# Altium PCB Buton_Unit.PcbDoc
Units mm, origin at the board's own origin, x right, y up, seen from the top; angles counter-clockwise.
Board outline 182.5 x 162.5 mm, 2 copper layers (Top Layer, Bottom Layer); 20 components, 40 nets, 86 pads, 0 vias.
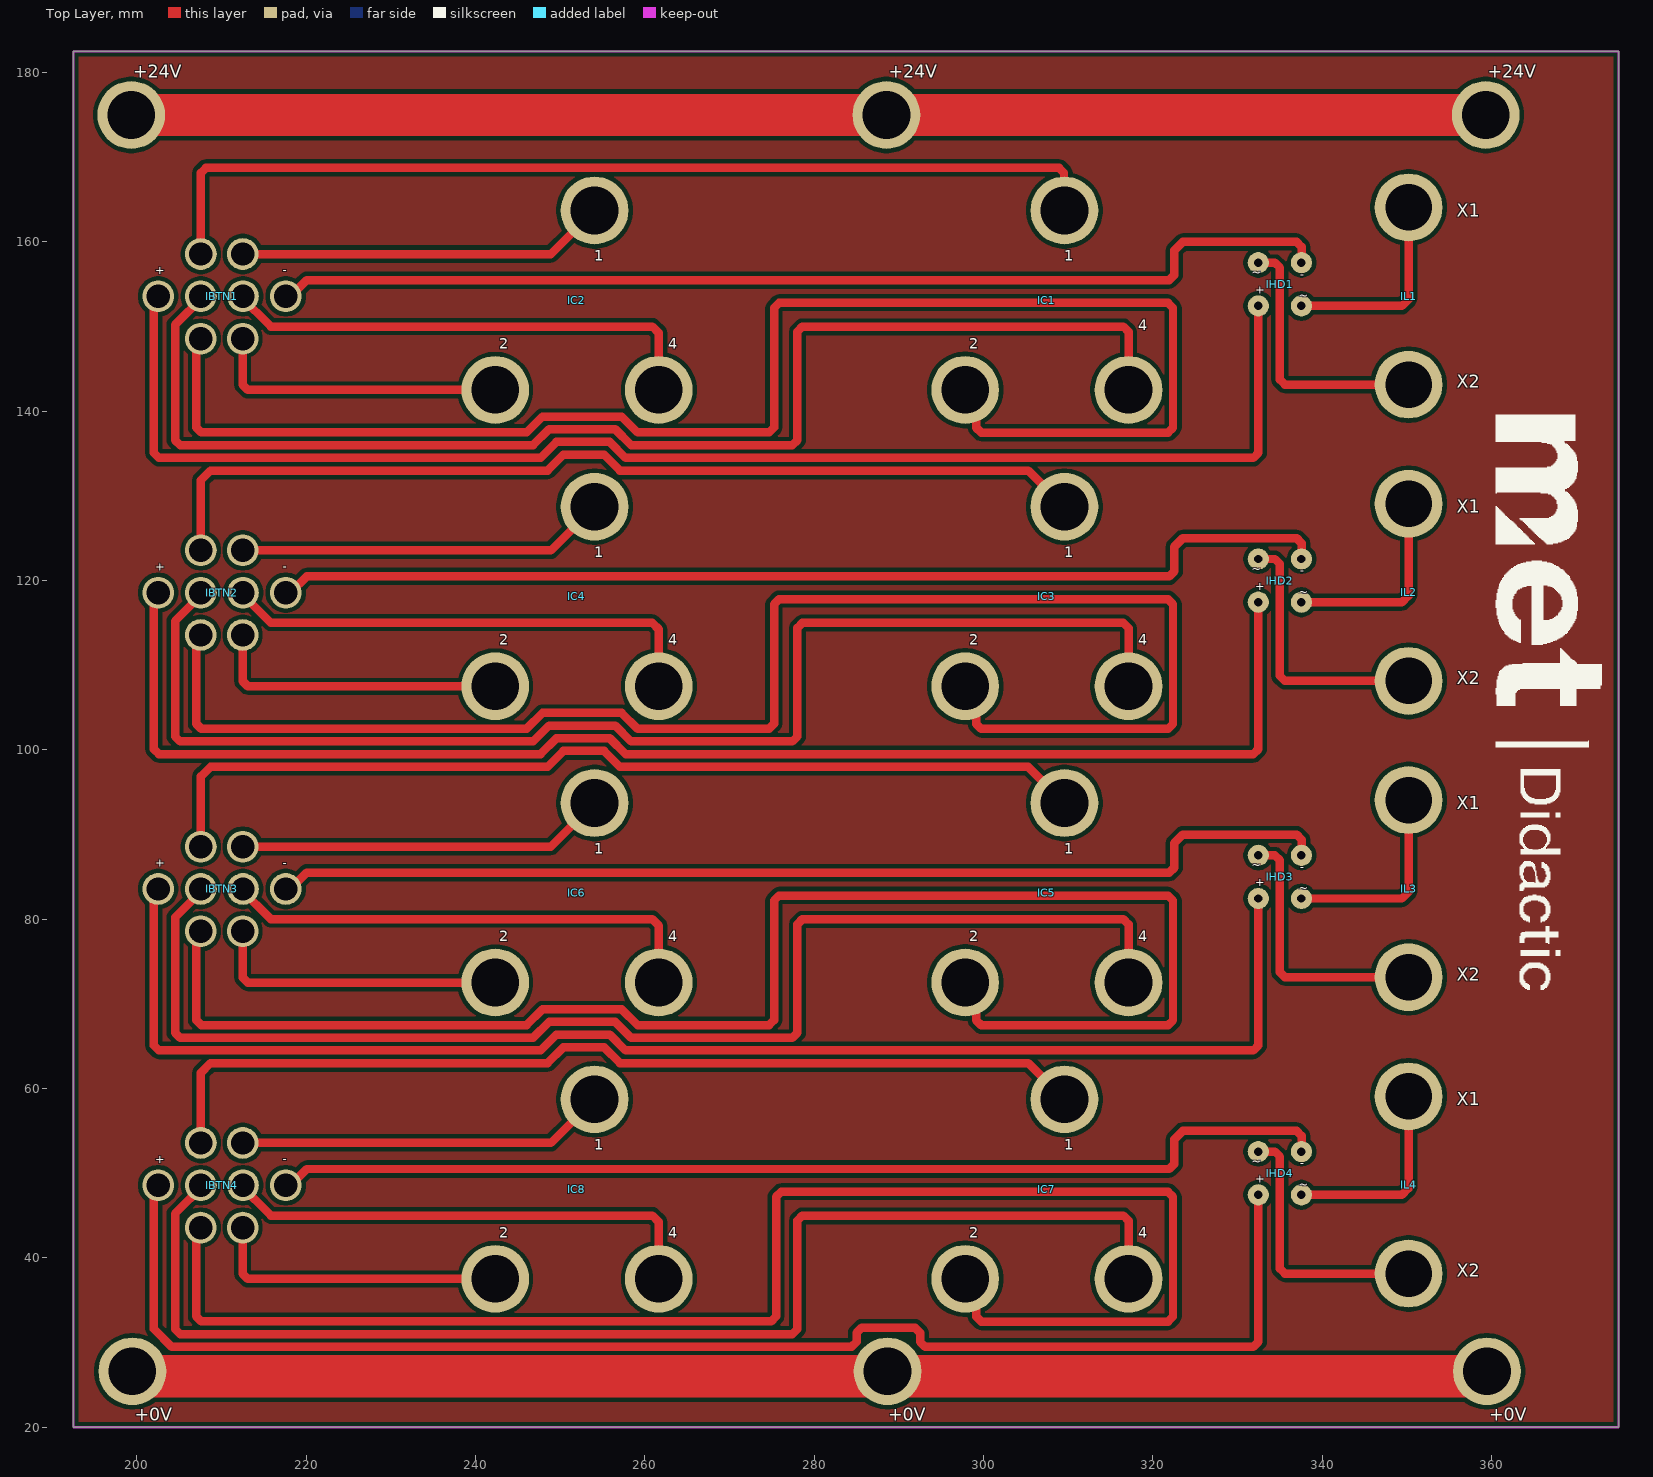
[diagram p0: Top Layer view]
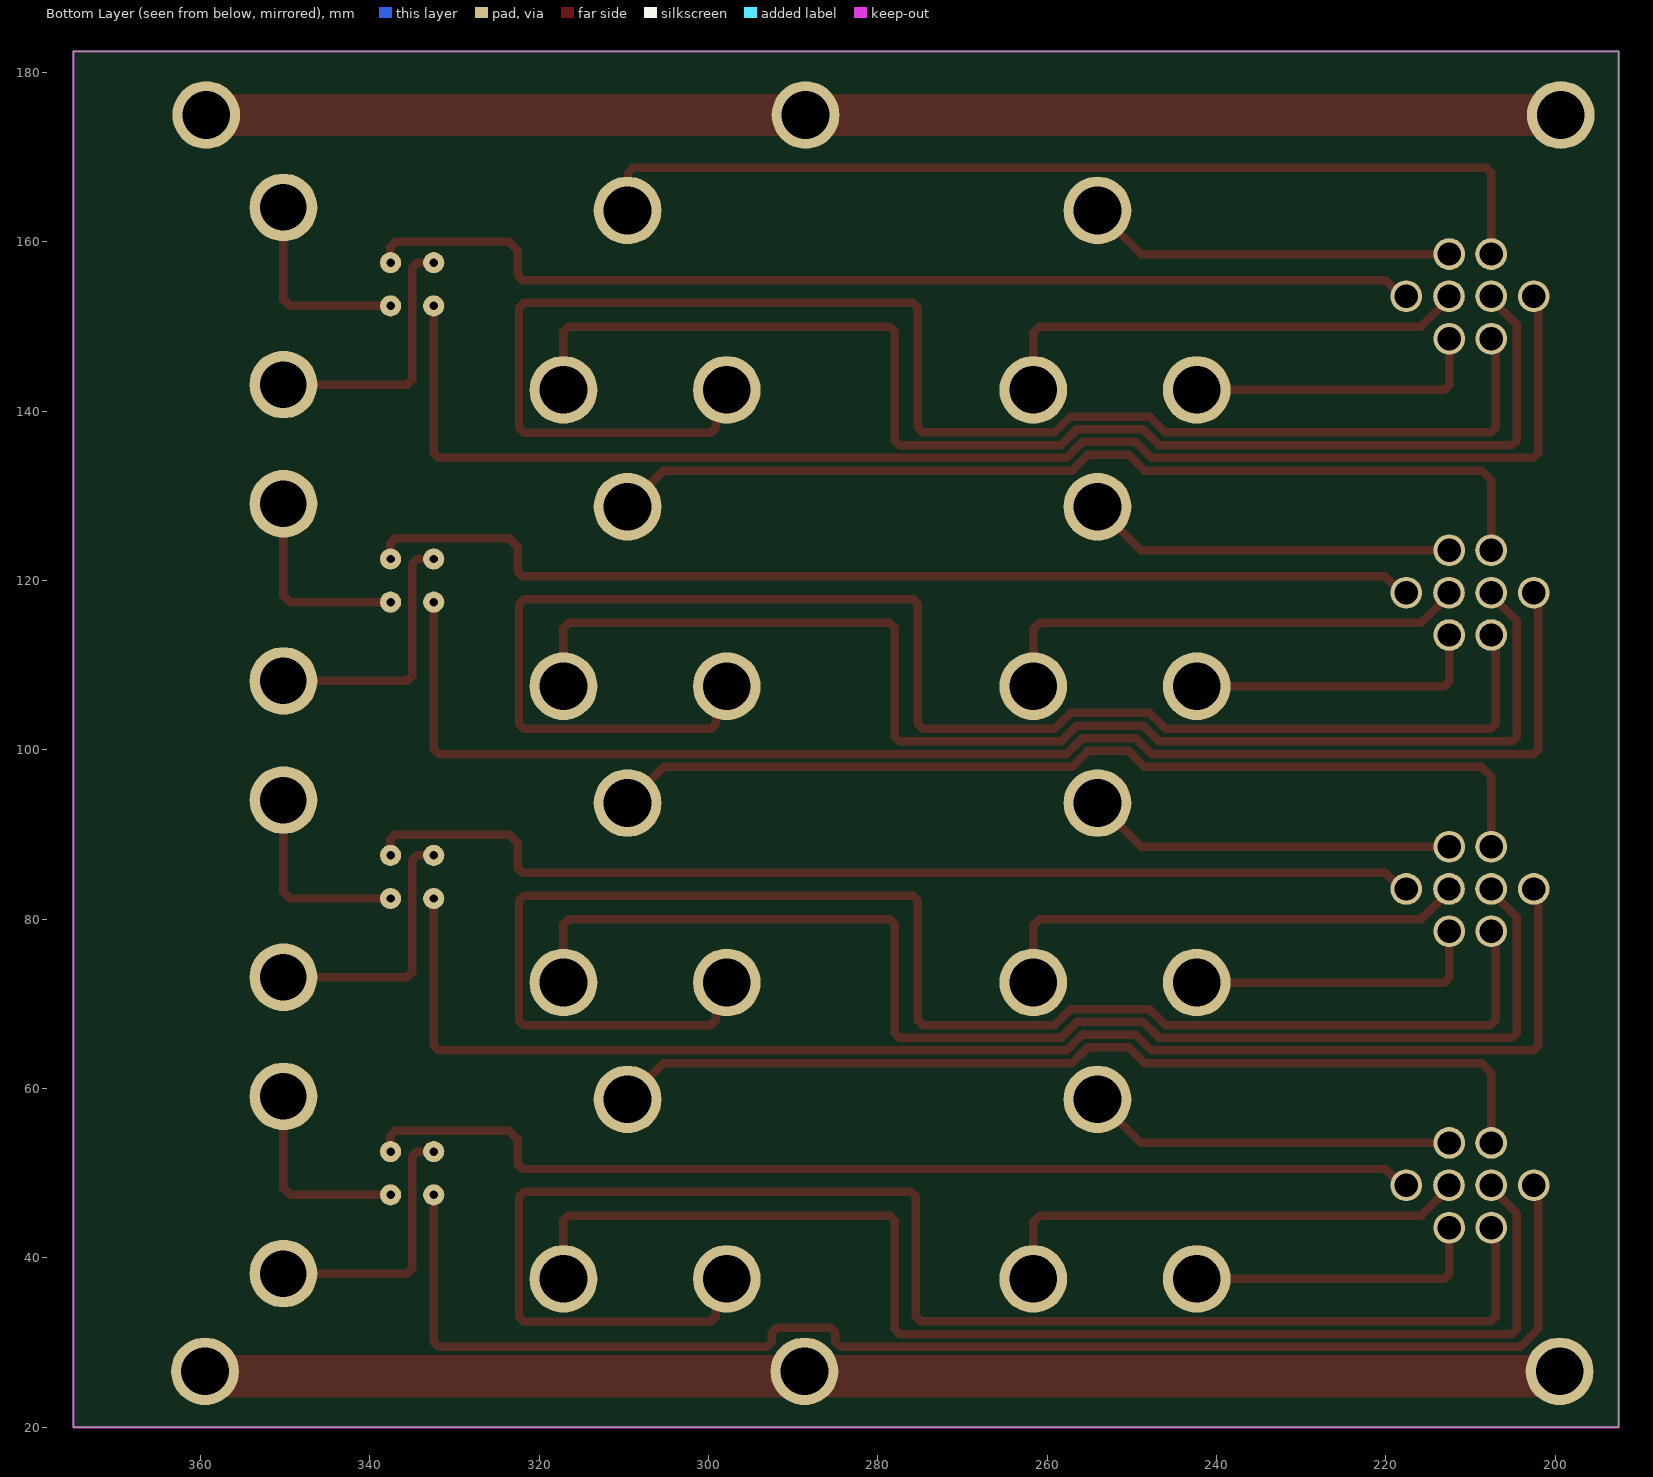
[diagram p1: Bottom Layer view, seen from below]

## Layer stack, top to bottom
Top Solder: solder mask 0.0102, Solder Resist, Dk 3.5
Top Layer: signal copper 0.0356
Dielectric 1: dielectric 0.32, FR-4, Dk 4.8
Bottom Layer: signal copper 0.0356
Bottom Solder: solder mask 0.0102, Solder Resist, Dk 3.5

## Board outline
192.5,20 375,20 375,182.5 192.5,182.5

## Design rules (kind name [scope] priority, off if disabled: settings)
Clearance [All] p1: gap=0.5 ignorepadtopadclearanceinfootprint=FALSE
PolygonConnect [All] p1: connectstyle=Relief reliefconductorwidth=0.254 reliefentries=4 polygonreliefangle="90 Angle" airgapwidth=0.254
RoutingCorners [All] p1: cornerstyle=45-Degree minsetback=2.5 maxsetback=2.5
RoutingLayers [All] p1: top layer_v5=TRUE bottom layer_v5=FALSE
RoutingVias [All] p1: holewidth=0.711 width=1.27 viastyle="Through Hole" minholewidth=0.711 minwidth=1.27 maxholewidth=0.711 maxwidth=1.27
SolderMaskExpansion [All] p1: expansion=0.102 istentingtop=FALSE
Width [All] p1: maxlimit=5 minlimit=1 preferedwidth=1.25 minimp=50.000000 maximp=50.000000 favimp=50.000000
28 further rules are at their usual default settings.

## Components (designator, comment, footprint, x,y, rotation, side; value= is the part's Value field where it differs from the comment)
IBTN1 "8 Pın Buton" 8_Pin_Buton 199.009,143.083 r0 top
IBTN2 "8 Pın Buton" 8_Pin_Buton 199.009,108.083 r0 top
IBTN3 "8 Pın Buton" 8_Pin_Buton 199.009,73.083 r0 top
IBTN4 "8 Pın Buton" 8_Pin_Buton 199.009,38.083 r0 top
IC1 "3 Pin Pano Contact" Contact 293.3,138.025 r0 top
IC2 "3 Pin Pano Contact" Contact 237.8,138.025 r0 top
IC3 "3 Pin Pano Contact" Contact 293.3,103.025 r0 top
IC4 "3 Pin Pano Contact" Contact 237.8,103.025 r0 top
IC5 "3 Pin Pano Contact" Contact 293.3,68.025 r0 top
IC6 "3 Pin Pano Contact" Contact 237.8,68.025 r0 top
IC7 "3 Pin Pano Contact" Contact 293.3,33.025 r0 top
IC8 "3 Pin Pano Contact" Contact 237.8,33.025 r0 top
IHD1 "4 Pin Diot Bridge" W10M 335,155 r0 top
IHD2 "4 Pin Diot Bridge" W10M 335,120 r0 top
IHD3 "4 Pin Diot Bridge" W10M 335,85 r0 top
IHD4 "4 Pin Diot Bridge" W10M 335,50 r0 top
IL1 "2 Pin Led Contact" LED_Contact 345.275,138.475 r0 top
IL2 "2 Pin Led Contact" LED_Contact 345.275,103.475 r0 top
IL3 "2 Pin Led Contact" LED_Contact 345.275,68.475 r0 top
IL4 "2 Pin Led Contact" LED_Contact 345.275,33.475 r0 top

## Footprints (in the part's own frame and the unit in brackets; to place one, negate y for a bottom-side part, rotate by r counter-clockwise, add the part's x,y. Pads: shape width x height; smd on the part's side, far side on the other; paste and mask are expansions set on the pad)
8_Pin_Buton [mm]
  round 3.75 hole 2.75: 1(3.491,10.492) 2(18.566,10.492) 3(8.541,15.492) 4(13.491,15.492) 5(8.541,10.492) 6(13.516,10.492) 7(8.516,5.492) 8(13.491,5.492)
Contact [mm]
  round 8 hole 5.63: 1(16.25,25.7) 2(4.525,4.5) 3(23.825,4.5)
LED_Contact [mm]
  round 8 hole 5.5: 1(4.925,25.6) 2(4.925,4.675)
W10M [mm]
  round 2.5 hole 1: 1(-2.55,-2.55) 2(2.55,-2.55) 3(2.55,2.55) 4(-2.55,2.55)

## Part data
IBTN1 IBTN2 IBTN3 IBTN4: library part "PBL16_AC_DC 24V_IP65"
IC1 IC2 IC3 IC4 IC5 IC6 IC7 IC8: library part Contact
IHD1 IHD2 IHD3 IHD4: library part W10M
IL1 IL2 IL3 IL4: library part LED_Contact

## Free pads (board coordinates)
  round 8 hole 5.63: +0V(199.461,26.6) +0V(288.661,26.6) +0V(359.461,26.6) +24V(199.325,175) +24V(288.525,175) +24V(359.325,175)

## Nets (pads, with @x,y where several pads share a name; then routed paths per layer and width w, separated by ;. In a path a pad name is that pad's centre, name@x,y a point inside that pad or via, vN(x,y) a via of type N, cw(c..) or ccw(c..) an arc to the next point about the centre after c; other vN are vias at no path point)
+: IBTN1.1 IHD1.1 | length 168.6
  Top Layer w1: IBTN1.1 201.997,153.072 201.997,135.086 202.583,134.5 247.675,134.5 249.55,136.375 255.839,136.375 257.714,134.5 331.864,134.5 332.45,135.086 IHD1.1
+1: IBTN2.1 IHD2.1 | length 168.6
  Top Layer w1: IBTN2.1 201.997,118.072 201.997,100.086 202.583,99.5 247.675,99.5 249.55,101.375 255.839,101.375 257.714,99.5 331.864,99.5 332.45,100.086 IHD2.1
+2: IBTN3.1 IHD3.1 | length 168.6
  Top Layer w1: IBTN3.1 201.997,83.072 201.997,65.086 202.583,64.5 247.675,64.5 249.55,66.375 255.839,66.375 257.714,64.5 331.864,64.5 332.45,65.086 IHD3.1
+3: IBTN4.1 IHD4.1 | length 169.2
  Top Layer w1: IBTN4.1 202,48.075 202,31.6 204.1,29.5 284.414,29.5 285,30.086 285,31.164 285.586,31.75 291.914,31.75 292.5,31.164 292.5,30.086 293.086,29.5 331.864,29.5 332.45,30.086 IHD4.1
-: IBTN1.2 IHD1.3 | length 126.5
  Top Layer w1: IBTN1.2@217.6,153.575 218.136,153.575 220.061,155.5 321.939,155.5 322.525,156.086 322.525,159 323.525,160 336.989,160 337.575,159.414 IHD1.3@337.575,157.55
-1: IBTN2.2 IHD2.3 | length 126.5
  Top Layer w1: IBTN2.2@217.6,118.575 218.136,118.575 220.061,120.5 321.939,120.5 322.525,121.086 322.525,124 323.525,125 336.989,125 337.575,124.414 IHD2.3@337.575,122.55
-2: IBTN3.2 IHD3.3 | length 126.5
  Top Layer w1: IBTN3.2@217.6,83.575 218.136,83.575 220.061,85.5 321.939,85.5 322.525,86.086 322.525,89 323.525,90 336.989,90 337.575,89.414 IHD3.3@337.575,87.55
-3: IBTN4.2 IHD4.3 | length 126.5
  Top Layer w1: IBTN4.2@217.6,48.575 218.136,48.575 220.061,50.5 321.939,50.5 322.525,51.086 322.525,54 323.525,55 336.989,55 337.575,54.414 IHD4.3@337.575,52.55
C: IBTN1.3 IC1.1 | length 116.5
  Top Layer w1: IBTN1.3 207.55,168.164 208.136,168.75 308.914,168.75 309.5,168.164 309.5,163.775 IC1.1
C1: IBTN2.3 IC3.1 | length 114.1
  Top Layer w1: IBTN2.3 207.55,131.864 208.686,133 248.5,133 250.375,134.875 255.175,134.875 257.05,133 305.275,133 IC3.1
C2: IBTN3.3 IC5.1 | length 114.1
  Top Layer w1: IBTN3.3 207.55,96.864 208.686,98 248.5,98 250.375,99.875 255.175,99.875 257.05,98 305.275,98 IC5.1
C3: IBTN4.3 IC7.1 | length 114.1
  Top Layer w1: IBTN4.3 207.55,61.864 208.686,63 248.5,63 250.375,64.875 255.175,64.875 257.05,63 305.275,63 IC7.1
NC: IBTN1.7 IC1.2 | length 185.6
  Top Layer w1: IBTN1.7 207,148.05 207,138.086 207.586,137.5 246.025,137.5 247.9,139.375 257.25,139.375 259.125,137.5 274.664,137.5 275.25,138.086 275.25,152.214 275.836,152.8 321.789,152.8 322.375,152.214 322.375,138.061 321.789,137.475 299.725,137.475 299.139,138.061 299.139,141.211 IC1.2
NC1: IBTN2.7 IC3.2 | length 185.6
  Top Layer w1: IBTN2.7 207,113.05 207,103.086 207.586,102.5 246.025,102.5 247.9,104.375 257.25,104.375 259.125,102.5 274.664,102.5 275.25,103.086 275.25,117.214 275.836,117.8 321.789,117.8 322.375,117.214 322.375,103.061 321.789,102.475 299.725,102.475 299.139,103.061 299.139,106.211 IC3.2
NC2: IBTN3.7 IC5.2 | length 185.6
  Top Layer w1: IBTN3.7 207,78.05 207,68.086 207.586,67.5 246.025,67.5 247.9,69.375 257.25,69.375 259.125,67.5 274.664,67.5 275.25,68.086 275.25,82.214 275.836,82.8 321.789,82.8 322.375,82.214 322.375,68.061 321.789,67.475 299.725,67.475 299.139,68.061 299.139,71.211 IC5.2
NC3: IBTN4.7 IC7.2 | length 184.1
  Top Layer w1: IBTN4.7 207,43.05 207,33.086 207.586,32.5 274.914,32.5 275.5,33.086 275.5,47.214 276.086,47.8 321.789,47.8 322.375,47.214 322.375,33.061 321.789,32.475 299.725,32.475 299.139,33.061 299.139,36.211 IC7.2
NetIBTN1_4: IBTN1.4 IC2.1 | length 43.7
  Top Layer w1: IBTN1.4 243.9,158.575 248.9,158.575 IC2.1
NetIBTN1_8: IBTN1.8 IC2.2 | length 35.5
  Top Layer w1: IBTN1.8 212.5,143.111 213.086,142.525 IC2.2
NetIBTN2_4: IBTN2.4 IC4.1 | length 43.7
  Top Layer w1: IBTN2.4 243.9,123.575 248.9,123.575 IC4.1
NetIBTN2_8: IBTN2.8 IC4.2 | length 35.5
  Top Layer w1: IBTN2.8 212.5,108.111 213.086,107.525 IC4.2
NetIBTN3_4: IBTN3.4 IC6.1 | length 43.7
  Top Layer w1: IBTN3.4 243.9,88.575 248.9,88.575 IC6.1
NetIBTN3_8: IBTN3.8 IC6.2 | length 35.5
  Top Layer w1: IBTN3.8 212.5,73.111 213.086,72.525 IC6.2
NetIBTN4_4: IBTN4.4 IC8.1 | length 43.7
  Top Layer w1: IBTN4.4 243.9,53.575 248.9,53.575 IC8.1
NetIBTN4_8: IBTN4.8 IC8.2 | length 35.5
  Top Layer w1: IBTN4.8 212.5,38.111 213.086,37.525 IC8.2
NetIHD1_2: IHD1.2 IL1.1 | length 23.8
  Top Layer w1: IHD1.2 349.414,152.45 350.2,153.236 IL1.1
NetIHD2_2: IHD2.2 IL2.1 | length 23.8
  Top Layer w1: IHD2.2 349.414,117.45 350.2,118.236 IL2.1
NetIHD3_2: IHD3.2 IL3.1 | length 23.8
  Top Layer w1: IHD3.2 349.414,82.45 350.2,83.236 IL3.1
NetIHD4_2: IHD4.2 IL4.1 | length 23.8
  Top Layer w1: IHD4.2 349.414,47.45 350.2,48.236 IL4.1
NO: IBTN1.5 IC1.3 | length 153.2
  Top Layer w1: IBTN1.5@207.85,153.575 204.5,150.225 204.5,136.586 205.086,136 246.8,136 248.675,137.875 256.5,137.875 258.375,136 277.414,136 278,136.586 278,149.414 278.586,150 316.514,150 317.125,149.389 IC1.3
NO1: IBTN2.5 IC3.3 | length 153.2
  Top Layer w1: IBTN2.5@207.85,118.575 204.5,115.225 204.5,101.586 205.086,101 246.8,101 248.675,102.875 256.5,102.875 258.375,101 277.414,101 278,101.586 278,114.414 278.586,115 316.514,115 317.125,114.389 IC3.3
NO2: IBTN3.5 IC5.3 | length 153.2
  Top Layer w1: IBTN3.5@207.85,83.575 204.5,80.225 204.5,66.586 205.086,66 246.8,66 248.675,67.875 256.5,67.875 258.375,66 277.414,66 278,66.586 278,79.414 278.586,80 316.514,80 317.125,79.389 IC5.3
NO3: IBTN4.5 IC7.3 | length 151.7
  Top Layer w1: IBTN4.5@207.85,48.575 204.5,45.225 204.5,31.586 205.086,31 277.414,31 278,31.586 278,44.414 278.586,45 316.514,45 317.125,44.389 IC7.3
NO_0.1: IBTN1.6 IC2.3 | length 57.9
  Top Layer w1: IBTN1.6@212.25,153.575 215.825,150 260.875,150 261.625,149.25 IC2.3
NO_1.1: IBTN2.6 IC4.3 | length 57.9
  Top Layer w1: IBTN2.6@212.25,118.575 215.825,115 260.875,115 261.625,114.25 IC4.3
NO_2.1: IBTN3.6 IC6.3 | length 57.9
  Top Layer w1: IBTN3.6@212.25,83.575 215.825,80 260.875,80 261.625,79.25 IC6.3
NO_3.1: IBTN4.6 IC8.3 | length 57.9
  Top Layer w1: IBTN4.6@212.25,48.575 215.825,45 260.875,45 261.625,44.25 IC8.3
~: IHD1.4 IL1.2 | length 31.5
  Top Layer w1: IHD1.4 334.414,157.55 335,156.964 335,143.736 335.586,143.15 IL1.2
~1: IHD2.4 IL2.2 | length 31.5
  Top Layer w1: IHD2.4 334.414,122.55 335,121.964 335,108.736 335.586,108.15 IL2.2
~2: IHD3.4 IL3.2 | length 31.5
  Top Layer w1: IHD3.4 334.414,87.55 335,86.964 335,73.736 335.586,73.15 IL3.2
~3: IHD4.4 IL4.2 | length 31.5
  Top Layer w1: IHD4.4 334.414,52.55 335,51.964 335,38.736 335.586,38.15 IL4.2
copper on no net: | length 321
  Top Layer w5: 199.325,175 288.525,175 359.325,175 ; 199.461,26.6 200.035,26.026 202.156,26.026 202.182,26 287.249,26 287.849,26.6 288.661,26.6 289.235,26.026 291.356,26.026 291.382,26 358.049,26 358.649,26.6 359.461,26.6

## Polygon pours and split planes (outlines as drawn)
no net on Top Layer "NONET_L01_P000" (solid, pour order 0): 192.5,182.5 375,182.5 375,20 192.5,20

## Keep-outs
Keep-Out Layer:
  the board outline again, w0.254

## Silkscreen, mask and mechanical layers (free items; w line width, h text height)
Top Overlay:
  drawing of 15 lines, arcs and shapes, not listed
  text "+24V" at 199.579,179.404 h1.52
  text "+24V" at 288.779,179.404 h1.52
  text "+24V" at 359.579,179.404 h1.52
  text "X1" at 355.879,163.004 h1.52
  text "1" at 254.029,157.754 h1.25
  text "1" at 309.529,157.754 h1.25
  text "~" at 332.783,156.779 h1 r180
  text "-" at 337.883,156.446 h1 r180
  text "-" at 217.242,156.229 h1
  text "+" at 202.167,156.188 h1
  text "+" at 332.117,153.887 h1
  text "~" at 337.217,153.221 h1
  text "4" at 318.279,149.554 h1.25
  text "2" at 242.779,147.404 h1.25
  text "4" at 262.779,147.404 h1.25
  text "2" at 298.279,147.404 h1.25
  text "X2" at 355.879,142.754 h1.52
  text "X1" at 355.879,128.004 h1.52
  text "1" at 254.029,122.754 h1.25
  text "1" at 309.529,122.754 h1.25
  text "~" at 332.783,121.779 h1 r180
  text "-" at 337.883,121.446 h1 r180
  text "-" at 217.242,121.229 h1
  text "+" at 202.167,121.188 h1
  text "+" at 332.117,118.887 h1
  text "~" at 337.217,118.221 h1
  text "2" at 242.779,112.404 h1.25
  text "4" at 262.779,112.404 h1.25
  text "2" at 298.279,112.404 h1.25
  text "4" at 318.279,112.404 h1.25
  text "X2" at 355.879,107.754 h1.52
  text "X1" at 355.879,93.004 h1.52
  text "1" at 254.029,87.754 h1.25
  text "1" at 309.529,87.754 h1.25
  text "~" at 332.783,86.779 h1 r180
  text "-" at 337.883,86.446 h1 r180
  text "-" at 217.242,86.229 h1
  text "+" at 202.167,86.188 h1
  text "+" at 332.117,83.887 h1
  text "~" at 337.217,83.221 h1
  text "2" at 242.779,77.404 h1.25
  text "4" at 262.779,77.404 h1.25
  text "2" at 298.279,77.404 h1.25
  text "4" at 318.279,77.404 h1.25
  text "X2" at 355.879,72.754 h1.52
  text "X1" at 355.879,58.004 h1.52
  text "1" at 254.029,52.754 h1.25
  text "1" at 309.529,52.754 h1.25
  text "~" at 332.783,51.779 h1 r180
  text "-" at 337.883,51.446 h1 r180
  text "-" at 217.242,51.229 h1
  text "+" at 202.167,51.188 h1
  text "+" at 332.117,48.887 h1
  text "~" at 337.217,48.221 h1
  text "2" at 242.779,42.404 h1.25
  text "4" at 262.779,42.404 h1.25
  text "2" at 298.279,42.404 h1.25
  text "4" at 318.279,42.404 h1.25
  text "X2" at 355.879,37.754 h1.52
  text "+0V" at 199.754,20.754 h1.52
  text "+0V" at 288.754,20.754 h1.52
  text "+0V" at 359.754,20.754 h1.52
Drill Guide:
  drawing of 167 lines, arcs and shapes, not listed
Mechanical 1:
  circle w0.013: c199.461,26.601 r4.1
  circle w0.013: c359.461,26.601 r4.1
  circle w0.013: c288.66,26.607 r4.1
  circle w0.013: c199.325,175.009 r4.1
  circle w0.013: c288.525,175.009 r4.1
  circle w0.013: c359.325,175.009 r4.1